# EAGLE board control_panel (EAGLE 6.5.0)
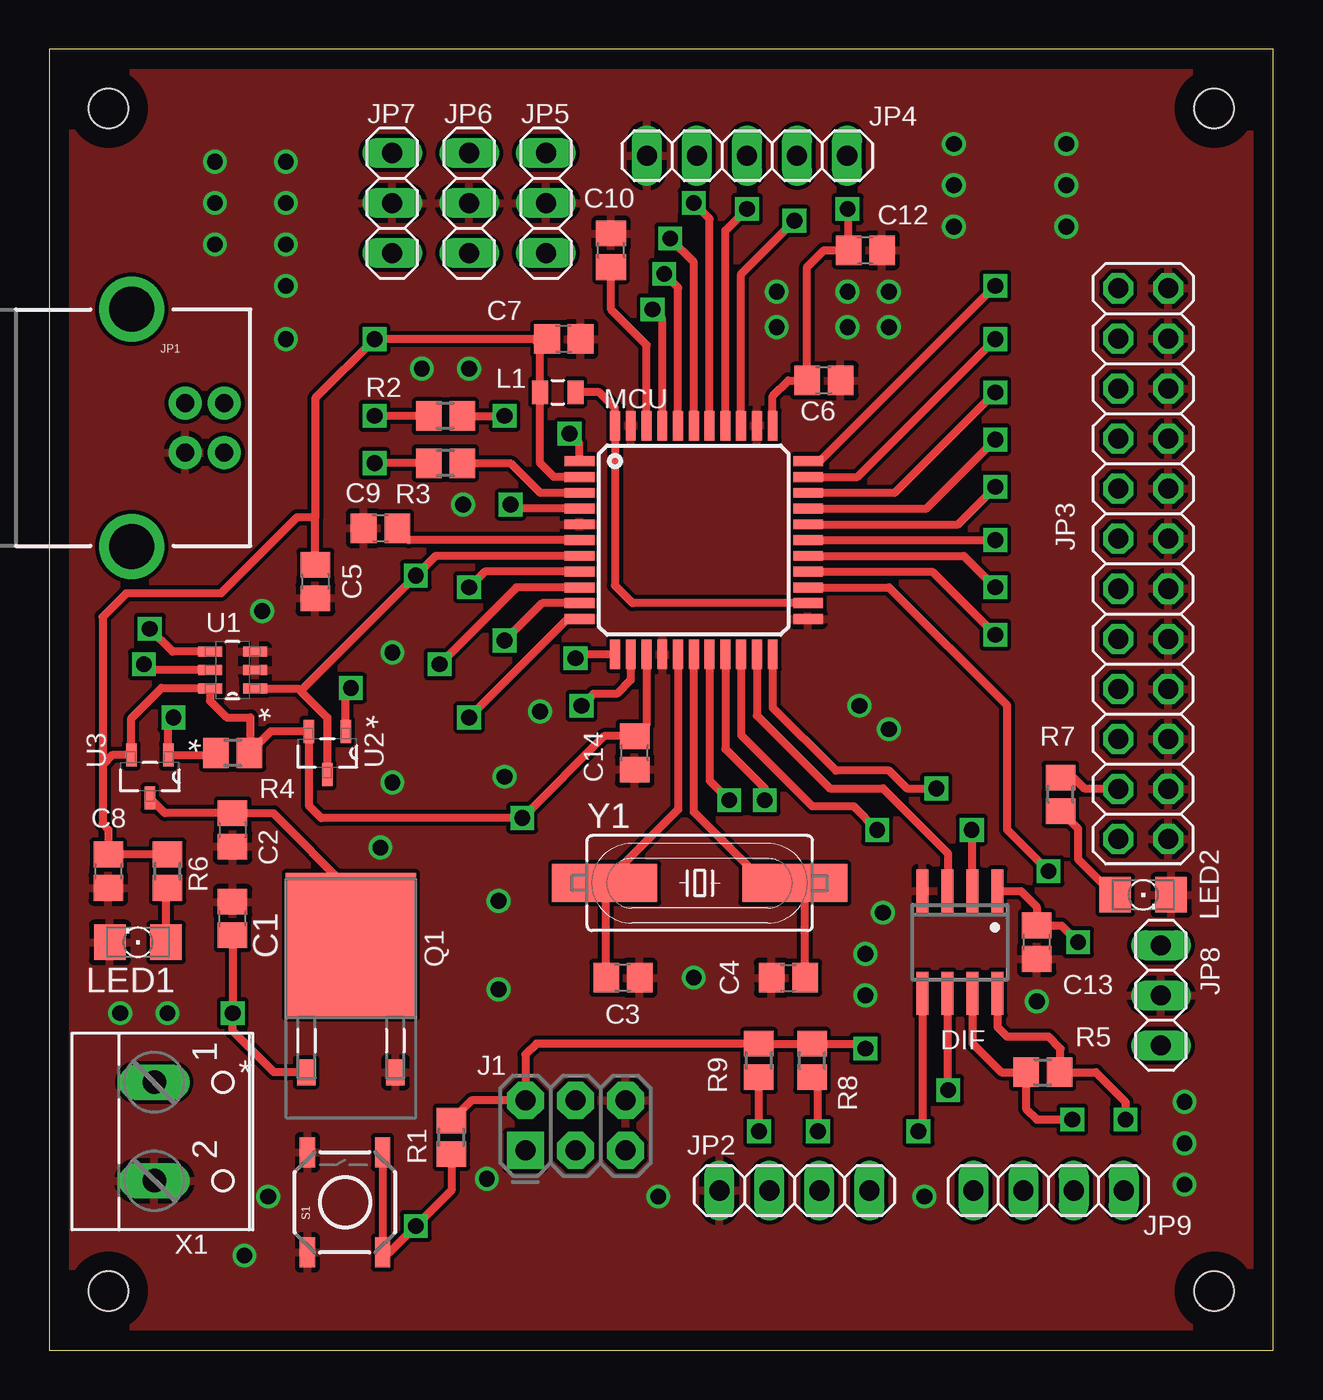
[diagram p0: board, top side]
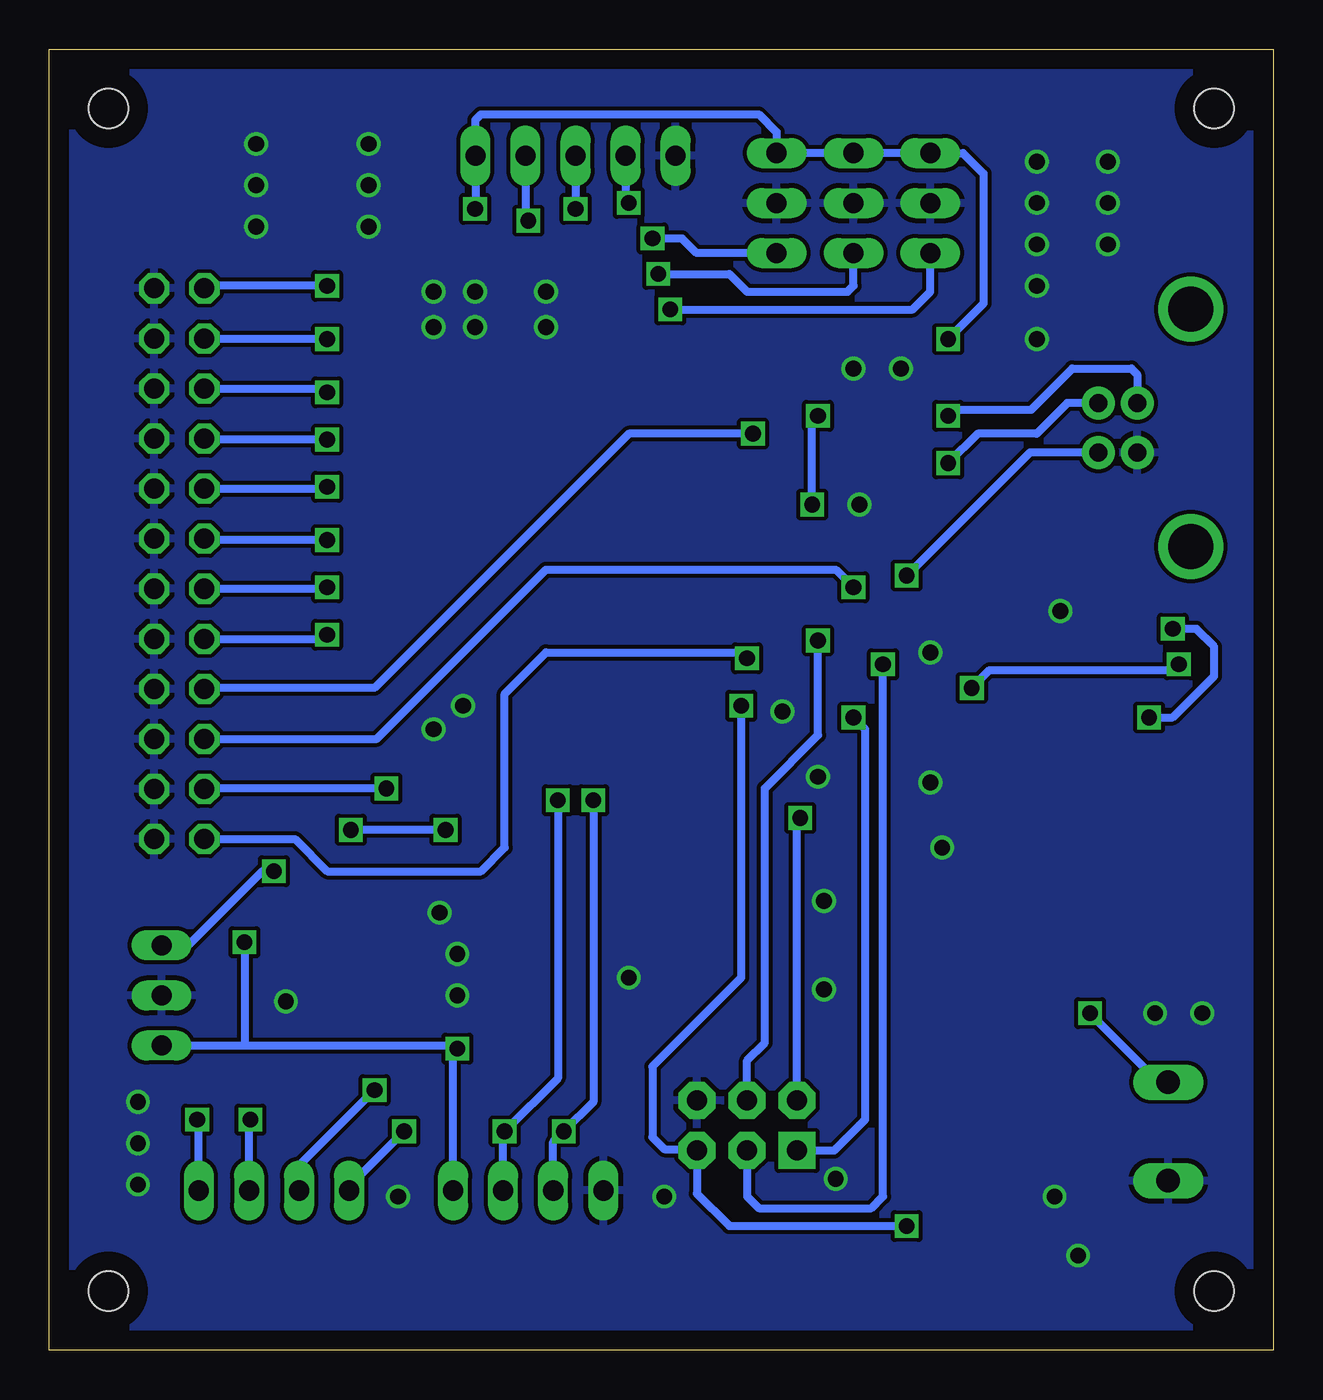
[diagram p1: board, bottom side, seen from below]

Size 62.1 x 66 mm. Coordinates in mm from the lower left corner, seen from the top.
Outline: 0,0 62.1,0 62.1,66 0,66 0,0
Copper layers (1*16): Top 0.035mm / dielectric 1.5mm / Bottom 0.035mm
Design rules "default *": minimum track width 10mil, minimum drill 24mil, track to track 0.2mm, track to pad 0.2mm, pad to pad 0.2mm, via to via 0.3mm, smd to smd 0mil, copper to edge 1mm, drill to drill 0.3mm, minimum pad ring 10mil, minimum via ring 8mil, stop-mask expansion 4mil, vias tented up to drill 0mil, thermal gap 10mil
Holes 2 mm at 3,63 59.1,63 59.1,3 3,3

## Footprints (pad centres in the part's own frame; a part is rotated, then mirrored left to right if it is on the bottom)
C0805 = smd 1.3 x 1.5: 1 -0.85,0; 2 0.85,0
SOIC8 = smd 0.6 x 2.2: 1 -1.905,-2.6; 2 -0.635,-2.6; 3 0.635,-2.6; 4 1.905,-2.6; 5 1.905,2.6; 6 0.635,2.6; 7 -0.635,2.6; 8 -1.905,2.6
2X3-NS = drill 1.016 pad 1.88 square: 1 -2.54,-1.27 | drill 1.016 pad 1.88 octagon: 2 -2.54,1.27; 3 0,-1.27; 4 0,1.27; 5 2.54,-1.27; 6 2.54,1.27
USB-B-PTH = drill 0.914 pad 1.676: D+ 0,1.25; D- 1.981,1.25; GND 0,-1.25; VBUS 1.981,-1.25 | drill 2.286: S1 -2.718,-6.02; S2 -2.718,6.02
1X04 = drill 1.016 long: 1 -3.81,0; 2 -1.27,0; 3 1.27,0; 4 3.81,0
2X12 = drill 1.016 octagon: 1 -13.97,-1.27; 2 -13.97,1.27; 3 -11.43,-1.27; 4 -11.43,1.27; 5 -8.89,-1.27; 6 -8.89,1.27; 7 -6.35,-1.27; 8 -6.35,1.27; 9 -3.81,-1.27; 10 -3.81,1.27; 11 -1.27,-1.27; 12 -1.27,1.27; 13 1.27,-1.27; 14 1.27,1.27; 15 3.81,-1.27; 16 3.81,1.27; 17 6.35,-1.27; 18 6.35,1.27; 19 8.89,-1.27; 20 8.89,1.27; 21 11.43,-1.27; 22 11.43,1.27; 23 13.97,-1.27; 24 13.97,1.27
1X05 = drill 1.016 long: 1 -5.08,0; 2 -2.54,0; 3 0,0; 4 2.54,0; 5 5.08,0
1X03 = drill 1.016 long: 1 -2.54,0; 2 0,0; 3 2.54,0
0805 = smd 0.8 x 1.2: 1 -0.9,0; 2 0.9,0
FKIT-LED-1206 = smd 1.6 x 1.803: A -1.422,0; C 1.422,0
SPARKFUN-DIGITALIC_TQFP44 = smd 1.5 x 0.5: 1 -5.8,4; 2 -5.8,3.2; 3 -5.8,2.4; 4 -5.8,1.6; 5 -5.8,0.8; 6 -5.8,0; 7 -5.8,-0.8; 8 -5.8,-1.6; 9 -5.8,-2.4; 10 -5.8,-3.2; 11 -5.8,-4; 23 5.8,-4; 24 5.8,-3.2; 25 5.8,-2.4; 26 5.8,-1.6; 27 5.8,-0.8; 28 5.8,0; 29 5.8,0.8; 30 5.8,1.6; 31 5.8,2.4; 32 5.8,3.2; 33 5.8,4 | smd 0.5 x 1.5: 12 -4,-5.8; 13 -3.2,-5.8; 14 -2.4,-5.8; 15 -1.6,-5.8; 16 -0.8,-5.8; 17 0,-5.8; 18 0.8,-5.8; 19 1.6,-5.8; 20 2.4,-5.8; 21 3.2,-5.8; 22 4,-5.8; 34 4,5.8; 35 3.2,5.8; 36 2.4,5.8; 37 1.6,5.8; 38 0.8,5.8; 39 0,5.8; 40 -0.8,5.8; 41 -1.6,5.8; 42 -2.4,5.8; 43 -3.2,5.8; 44 -4,5.8
TO225P972X240-3N = smd 0.94 x 1.321: 1 -2.261,-6.299; 3 2.261,-6.299 | smd 6.604 x 7.315: 2 0,0.152
R0805 = smd 1.3 x 1.5: 1 -0.85,0; 2 0.85,0
TACTILE_SWITCH_SMD = smd 1.524 x 0.762: 1 -2.54,1.905; 2 2.54,1.905; 3 -2.54,-1.905; 4 2.54,-1.905
SOT95P280X100-6N = smd 1.219 x 0.508: 1 -1.143,0.94; 2 -1.143,0; 3 -1.143,-0.94; 4 1.143,-0.94; 5 1.143,0; 6 1.143,0.94
SOT95P230X110-3N = smd 1.168 x 0.533: 1 -1.092,0.94; 2 -1.092,-0.94; 3 1.092,0
W237-102 = drill 1.194 long: 1 -2.5,-1.27; 2 2.5,-1.27
HC49UP = smd 5.334 x 1.93: 1 -4.826,0; 2 4.826,0

## Placement (x,y rotation side)
C1  330nF  [C0805]  9.3,21.9 90 top
C2  100nF  [C0805]  9.3,26.4 270 top
C3  22pF  [C0805]  29.1,18.9 180 top
C4  22pF  [C0805]  37.5,18.9 0 top
C5  100nF  [C0805]  13.5,39 270 top
C6  100nF  [C0805]  39.3,49.2 180 top
C7  100nF  [C0805]  26.1,51.3 180 top
C8  100nF  [C0805]  3,24.3 270 top
C9  100nF  [C0805]  16.8,41.7 0 top
C10  100nF  [C0805]  28.5,55.8 90 top
C12  100nF  [C0805]  41.4,55.8 0 top
C13  100nF  [C0805]  50.1,20.7 90 top
C14  100nF  [C0805]  29.7,30.3 90 top
DIF  DS8921M/NOPB  [SOIC8]  46.2,20.7 180 top
J1  AVR_SPI_PRG_6NS  [2X3-NS]  26.7,11.4 0 top
JP1  USB-B  [USB-B-PTH]  6.9,46.8 0 top
JP2  [1X04]  37.8,8.1 0 top
JP3  [2X12]  55.5,39.9 90 top
JP4  [1X05]  35.4,60.6 0 top
JP5  [1X03]  25.2,58.2 90 top
JP6  [1X03]  21.3,58.2 90 top
JP7  [1X03]  17.4,58.2 90 top
JP8  [1X03]  56.4,18 270 top
JP9  [1X04]  50.7,8.1 180 top
L1  10uH  [0805]  25.8,48.6 0 top
LED1  [FKIT-LED-1206]  4.5,20.7 180 top
LED2  [FKIT-LED-1206]  55.5,23.1 0 top
MCU  ATMEGA32U4TQFP  [SPARKFUN-DIGITALIC_TQFP44]  32.7,41.1 0 top
Q1  L78M05CDT  [TO225P972X240-3N]  15.3,20.4 0 top
R1  10k  [R0805]  20.4,10.8 90 top
R2  22  [R0805]  20.1,47.4 180 top
R3  22  [R0805]  20.1,45 180 top
R4  470k  [R0805]  9.3,30.3 180 top
R5  120  [R0805]  50.4,14.1 0 top
R6  330  [R0805]  6,24.3 90 top
R7  330  [R0805]  51.3,28.2 90 top
R8  10k  [R0805]  38.7,14.7 90 top
R9  10k  [R0805]  36,14.7 90 top
S1  [TACTILE_SWITCH_SMD]  15,7.5 90 top
U1  LTC4412ES6TRMPBF  [SOT95P280X100-6N]  9.3,34.5 180 top
U2  NX2301P  [SOT95P230X110-3N]  14.1,30.3 270 top
U3  NX2301P  [SOT95P230X110-3N]  5.1,29.1 270 top
X1  [W237-102]  6.6,11.1 270 top
Y1  [HC49UP]  33,23.7 0 top

## Library data of the parts
C1-C10 C12-C14 R1-R9 = resistor
DIF = rvp
J1 = SparkFun-Connectors
JP1 = SparkFun-Connectors; PROD_ID: CONN-08278
JP2-JP9 = pinhead
L1 = SparkFun-Passives
LED1 LED2 = SparkFun-LED
MCU = SparkFun-DigitalIC
Q1 = ST Microelctronics_By_element14_Batch_1; MPN: L78M05CDT; OC_FARNELL: 1087116; OC_NEWARK: 78K5325; PACKAGE: DPAK; SUPPLIER: STMICROELECTRONICS
S1 = SparkFun-Electromechanical; PROD_ID: SWCH-08247
U1 = LTC_By_element14_Batch_1; MPN: LTC4412ES6#TRMPBF; OC_FARNELL: 1663917; OC_NEWARK: 19P0727; PACKAGE: TSOT-23-6; SUPPLIER: Linear Technology
U2 U3 = NXP_By_element14_Batch_1; MPN: NX2301P; OC_FARNELL: 1894738; OC_NEWARK: 55T6935; PACKAGE: SOT-3; SUPPLIER: NXP
X1 = con-wago-500; MPN: 237-102; OC_FARNELL: unknown; OC_NEWARK: 70K9898
Y1 = SparkFun-FreqCtrl

## Nets
BTN_1: JP3.16 MCU.29
BTN_2: JP3.14 MCU.28
BTN_3: JP3.8 MCU.1
BTN_4: JP3.12 MCU.27
BTN_5: JP3.20 MCU.31
BTN_6: JP3.24 MCU.33
BTN_7/LED: JP3.4 MCU.22 R7.2
BTN_CAM_CENTER: JP3.18 MCU.30
BTN_CAM_DOWN: JP3.22 MCU.32
BTN_CAM_LEFT: JP3.10 MCU.26
BTN_CAM_RIGHT: JP3.2 MCU.12
BTN_CAM_UP: JP3.6 MCU.8
D+: JP1.D+ R2.2
D-: JP1.D- R3.2
DO+: DIF.6 JP9.3
DO-: DIF.5 JP9.4
GATE: U1.5 U2.1
GND: C1.2 C2.2 C3.1 C4.1 C5.2 C6.1 C7.1 C8.2 C9.1 C10.2 C12.2 C13.1 C14.1 DIF.4 J1.6 JP1.GND JP2.1 JP3.1 JP3.3 JP3.5 JP3.7 JP3.9 JP3.11 JP3.13 JP3.15 JP3.17 JP3.19 JP3.21 JP3.23 JP4.1 JP5.2 JP6.2 JP7.2 JP8.2 LED1.C LED2.C MCU.5 MCU.15 MCU.23 MCU.35 MCU.43 Q1.3 S1.1 S1.2 U1.2 U1.3 X1.2
JS1: JP4.4 MCU.36
JS2: JP4.3 MCU.37
JS_REF: JP4.2 MCU.38
MISO: J1.1 MCU.11
MOSI: J1.4 MCU.10
N$2: C3.2 MCU.16 Y1.1
N$3: C4.2 MCU.17 Y1.2
N$4: R4.2 U1.4 U3.1
N$5: DIF.2 MCU.20
N$6: C9.2 MCU.6
N$7: MCU.4 R2.1
N$8: MCU.3 R3.1
N$9: LED1.A R6.1
N$10: LED2.A R7.1
N$12: DIF.3 MCU.21
N$15: L1.2 MCU.24 MCU.44
N$17: C10.1 MCU.42
POT1: JP5.1 MCU.39
POT2: JP6.1 MCU.40
POT3: JP7.1 MCU.41
POT4: JP8.1 MCU.25
RESET: J1.5 MCU.13 R1.1 S1.3 S1.4
RI+: DIF.8 JP9.1 R5.2
RI-: DIF.7 JP9.2 R5.1
SCK: J1.3 MCU.9
SCL: JP2.2 MCU.18 R9.1
SDA: JP2.3 MCU.19 R8.1
V_EXT: C2.1 Q1.2 U3.3
V_IN: C1.1 Q1.1 X1.1
VBUS: JP1.VBUS MCU.7 U1.1 U2.3
VCC: C5.1 C6.2 C7.2 C8.1 C12.1 C13.2 C14.2 DIF.1 J1.2 JP2.4 JP4.5 JP5.3 JP6.3 JP7.3 JP8.3 L1.1 MCU.2 MCU.14 MCU.34 R1.2 R4.1 R6.2 R8.2 R9.2 U1.6 U2.2 U3.2

## Tracks (layer width: path | path; a pad name or v marks a point on that pad's centre or on a via)
BTN_1  (via drill 0.8)
  Top 0.406: MCU.29 46.1,41.9 v48,43.8
  Bottom 0.406: JP3.16 48.09,43.71 v48,43.8
BTN_2  (via drill 0.8)
  Top 0.406: MCU.28 v48,41.1
  Bottom 0.406: v48,41.1 54.16,41.1 JP3.14
BTN_3  (via drill 0.8)
  Top 0.406: MCU.1 26.9,46 v26.4,46.5
  Bottom 0.406: v26.4,46.5 32.7,46.5 45.6,33.6 54.18,33.6 JP3.8
BTN_4  (via drill 0.8)
  Top 0.406: MCU.27 46.4,40.3 v48,38.7
  Bottom 0.406: JP3.12 48.07,38.63 v48,38.7
BTN_5  (via drill 0.8)
  Top 0.406: MCU.31 42.9,43.5 v48,48.6
  Bottom 0.406: JP3.20 48.19,48.79 v48,48.6
BTN_6  (via drill 0.8)
  Top 0.406: MCU.33 39.1,45.1 v48,54
  Bottom 0.406: v48,54 54.1,54 JP3.24
BTN_7/LED  (via drill 0.8)
  Top 0.406: v45,28.5 43.5,28.5 42.6,29.4 39.9,29.4 36.7,32.6 MCU.22 | R7.2 51.95,29.05 52.5,28.5 54.2,28.5 JP3.4
  Bottom 0.406: v45,28.5 54.2,28.5 JP3.4
BTN_CAM_CENTER  (via drill 0.8)
  Top 0.406: MCU.30 44.5,42.7 v48,46.2
  Bottom 0.406: v48,46.2 54.18,46.2 JP3.18
BTN_CAM_DOWN  (via drill 0.8)
  Top 0.406: MCU.32 41,44.3 v48,51.3
  Bottom 0.406: v48,51.3 54.2,51.3 JP3.22
BTN_CAM_LEFT  (via drill 0.8)
  Top 0.406: MCU.26 44.8,39.5 v48,36.3
  Bottom 0.406: JP3.10 48.21,36.09 v48,36.3
BTN_CAM_RIGHT  (via drill 0.8)
  Top 0.406: MCU.12 26.9,35.3 v26.7,35.1
  Bottom 0.406: JP3.2 49.63,25.93 48,24.3 40.2,24.3 39,25.5 39,33.3 36.9,35.4 27,35.4 v26.7,35.1
BTN_CAM_UP  (via drill 0.8)
  Top 0.406: MCU.8 22.1,39.5 v21.3,38.7
  Bottom 0.406: v21.3,38.7 22.2,39.6 36.9,39.6 45.49,31.01 JP3.6
D+  (via drill 0.8)
  Top 0.406: R2.2 v16.5,47.4
  Bottom 0.406: v16.5,47.4 16.2,47.7 12.3,47.7 10.2,49.8 7.2,49.8 6.9,49.5 JP1.D+
D-  (via drill 0.8)
  Top 0.406: R3.2 v16.5,45
  Bottom 0.406: JP1.D- 10.45,48.05 12,46.5 15,46.5 v16.5,45
DO+  (via drill 0.8)
  Top 0.406: DIF.6 45.56,13.23 v45.6,13.2
  Bottom 0.406: JP9.3 49.43,9.37 v45.6,13.2
DO-  (via drill 0.8)
  Top 0.406: DIF.5 44.3,11.29 v44.1,11.1
  Bottom 0.406: JP9.4 46.89,8.31 v44.1,11.1
GATE  (via drill 0.8)
  Top 0.406: U1.5 5.1,34.5 v4.8,34.8 | U2.1 15.04,33.34 v15.3,33.6
  Bottom 0.406: v4.8,34.8 5.1,34.5 14.4,34.5 v15.3,33.6
GND  (via drill 0.8)
  other vias: 17.4,28.8 23.1,29.1 12,54 12,56.1 12,58.2 12,60.3 21,42.9 30.9,7.8 41.4,18 41.4,20.1 42.3,22.2 41.1,32.7 42.6,31.5 3.6,17.1 6,17.1 57.6,12.6 57.6,10.5 57.6,8.4 40.5,51.9 42.6,51.9 40.5,53.7 42.6,53.7 45.9,61.2 45.9,59.1 45.9,57 51.6,57 51.6,59.1 51.6,61.2 10.8,37.5 17.4,35.4 16.8,25.5 22.8,18.3 22.8,22.8 32.7,18.9 24.9,32.4 8.4,56.1 8.4,58.2 8.4,60.3 12,51.3 18.9,49.8 21.3,49.8 36.9,51.9 36.9,53.7 44.4,7.8 11.1,7.8 9.9,4.8 50.1,17.7 22.2,8.7
  pour Top: 0,66 62.1,66 62.1,0 0,0
  pour Bottom: 0,66 62.1,66 62.1,0 0,0
JS1  (via drill 0.8)
  Top 0.406: MCU.36 35.1,54.6 v37.8,57.3
  Bottom 0.406: JP4.4 37.94,57.44 v37.8,57.3
JS2  (via drill 0.8)
  Top 0.406: MCU.37 34.3,56.8 v35.4,57.9
  Bottom 0.406: JP4.3 v35.4,57.9
JS_REF  (via drill 0.8)
  Top 0.406: MCU.38 33.5,57.4 v32.7,58.2
  Bottom 0.406: JP4.2 32.86,58.36 v32.7,58.2
MISO  (via drill 0.8)
  Top 0.406: MCU.11 26.3,37.1 v21.3,32.1
  Bottom 0.406: J1.1 22.27,10.13 20.7,11.7 20.7,31.5 v21.3,32.1
MOSI  (via drill 0.8)
  Top 0.406: MCU.10 25,37.9 v23.1,36
  Bottom 0.406: J1.4 26.7,14.7 25.8,15.6 25.8,28.5 23.1,31.2 v23.1,36
N$2
  Top 0.406: MCU.16 31.9,27.43 Y1.1 28.25,23.62 C3.2
N$3
  Top 0.406: MCU.17 32.7,27.3 36.3,23.7 Y1.2 38.35,23.18 C4.2
N$4  (via drill 0.8)
  Top 0.406: R4.2 8.34,30.19 U3.1 6.04,31.84 v6.3,32.1 | U1.4 6.26,35.44 v5.1,36.6
  Bottom 0.406: v6.3,32.1 5.1,32.1 3,34.2 3,35.7 3.9,36.6 v5.1,36.6
N$5  (via drill 0.8)
  Top 0.406: MCU.20 35.1,31.2 38.7,27.6 40.8,27.6 v42,26.4 | DIF.2 46.84,26.36 v46.8,26.4
  Bottom 0.406: v42,26.4 v46.8,26.4
N$6
  Top 0.406: MCU.6 18.25,41.1 C9.2
N$7  (via drill 0.8)
  Top 0.406: MCU.4 23.6,42.7 v23.4,42.9 | R2.1 v23.1,47.4
  Bottom 0.406: v23.4,42.9 23.4,47.1 v23.1,47.4
N$8
  Top 0.406: R3.1 23.4,45 24.9,43.5 MCU.3
N$9
  Top 0.406: LED1.A 5.92,23.37 R6.1
N$10
  Top 0.406: LED2.A 54,23.1 52.2,24.9 52.2,26.45 R7.1
N$12
  Top 0.406: MCU.21 35.9,32.2 39.6,28.5 42.3,28.5 45.6,25.2 45.6,23.34 DIF.3
N$15
  Top 0.406: L1.2 27.9,48.6 28.7,47.8 MCU.44 28.7,38.8 29.6,37.9 MCU.24
N$17
  Top 0.406: MCU.42 30.3,51 28.5,52.8 C10.1
POT1  (via drill 0.8)
  Top 0.406: MCU.39 32.7,55.2 v31.5,56.4
  Bottom 0.406: JP5.1 29.26,55.66 30,56.4 v31.5,56.4
POT2  (via drill 0.8)
  Top 0.406: MCU.40 31.9,53.9 v31.2,54.6
  Bottom 0.406: v31.2,54.6 27.6,54.6 26.7,53.7 21.6,53.7 21.3,54 JP6.1
POT3  (via drill 0.8)
  Top 0.406: MCU.41 31.1,52.3 v30.6,52.8
  Bottom 0.406: v30.6,52.8 18.3,52.8 17.4,53.7 JP7.1
POT4  (via drill 0.8)
  Top 0.406: MCU.25 42.6,38.7 48.6,32.7 48.6,26.4 v50.7,24.3
  Bottom 0.406: JP8.1 55.06,20.54 51.3,24.3 v50.7,24.3
RESET  (via drill 0.8)
  Top 0.406: S1.4 S1.3 17.26,4.96 v18.6,6.3 20.4,8.1 R1.1 | MCU.13 29.5,34 28.8,33.3 27.6,33.3 v27,32.7
  Bottom 0.406: v18.6,6.3 27.6,6.3 29.24,7.94 J1.5 29.31,10.2 30.9,10.2 31.5,10.8 31.5,14.4 27,18.9 v27,32.7
RI+  (via drill 0.8)
  Top 0.406: v54.6,11.7 54.6,12.6 53.1,14.1 R5.2 51.3,14.15 51.3,15.3 50.7,15.9 48.6,15.9 48.1,16.39 DIF.8
  Bottom 0.406: JP9.1 54.51,11.61 v54.6,11.7
RI-  (via drill 0.8)
  Top 0.406: DIF.7 46.84,15.56 48.3,14.1 R5.1 49.55,12.25 50.1,11.7 v51.9,11.7
  Bottom 0.406: JP9.2 51.97,11.63 v51.9,11.7
SCK  (via drill 0.8)
  Top 0.406: MCU.9 23.7,38.7 v19.8,34.8
  Bottom 0.406: J1.3 26.7,7.8 26.1,7.2 20.4,7.2 19.8,7.8 v19.8,34.8
SCL  (via drill 0.8)
  Top 0.406: v36,11.1 R9.1 | MCU.18 33.5,28.9 v34.5,27.9
  Bottom 0.406: JP2.2 36.53,10.57 v36,11.1 34.5,12.6 v34.5,27.9
SDA  (via drill 0.8)
  Top 0.406: v39,11.1 39,13.55 R8.1 | MCU.19 34.3,30.5 36.3,28.5 v36.3,27.9
  Bottom 0.406: JP2.3 39.07,11.03 v39,11.1 36.3,13.8 v36.3,27.9
V_EXT
  Top 0.406: U3.3 5.86,27.25 C2.1 11.36,27.25 15.3,23.31 Q1.2
V_IN  (via drill 0.8)
  Top 0.406: C1.1 v9.3,17.1 9.3,16.2 11.4,14.1 Q1.1
  Bottom 0.406: X1.1 5.8,13.6 v9.3,17.1
VBUS  (via drill 0.8)
  Top 0.406: U1.1 12.64,33.56 12.75,33.45 | 12.75,33.45 14.1,32.1 U2.3 | MCU.7 19.6,40.3 v18.6,39.3 12.75,33.45
  Bottom 0.406: JP1.VBUS 12.35,45.55 v18.6,39.3
VCC  (via drill 0.8)
  Top 0.406: 2.7,29.7 3.19,30.19 U3.2 4.16,32.06 5.7,33.6 8.12,33.6 U1.6 8.16,32.94 9,32.1 10.2,32.1 10.2,30.35 R4.1 11.24,31.39 U2.2 13.16,27.64 13.8,27 v24,27 28.15,31.15 C14.2 30.3,31.75 MCU.14 | 2.7,29.7 2.7,26.7 3,26.4 C8.1 R6.2 | 2.7,29.7 2.7,37.2 3.9,38.4 8.7,38.4 12.55,42.25 13.5,42.25 | C5.1 13.5,42.25 | C7.2 24.6,51.3 | 24.6,51.3 v16.5,51.3 13.5,48.3 13.5,42.25 | 24.6,51.3 24.9,51 L1.1 24.9,45 25.6,44.3 MCU.2 | R1.2 21.42,12.67 J1.2 24.16,15 24.71,15.55 R9.2 R8.2 41.15,15.55 v41.4,15.3 | MCU.34 36.7,48.4 37.5,49.2 C6.2 38.45,54.95 39.3,55.8 C12.1 40.55,57.85 v40.5,57.9 | v52.2,20.7 51.35,21.55 C13.2 50.1,22.5 49.3,23.3 DIF.1
  Bottom 0.406: J1.2 24.16,26.84 v24,27 | v16.5,51.3 14.7,53.1 14.7,59.7 15.74,60.74 JP7.3 JP6.3 JP5.3 25.2,61.8 26.1,62.7 40.2,62.7 40.48,62.42 JP4.5 40.48,57.92 v40.5,57.9 | JP2.4 41.61,15.09 v41.4,15.3 41.56,15.46 52.2,15.46 | JP8.3 52.2,15.46 | v52.2,20.7 52.2,15.46